# Altium PCB AnalogHmw.PcbDoc
Units mm, origin at the board's own origin, x right, y up, seen from the top; angles counter-clockwise.
Board outline 40.89 x 27.05 mm, 2 copper layers (Top Layer, Bottom Layer); 10 components, 10 nets, 27 pads, 4 vias.
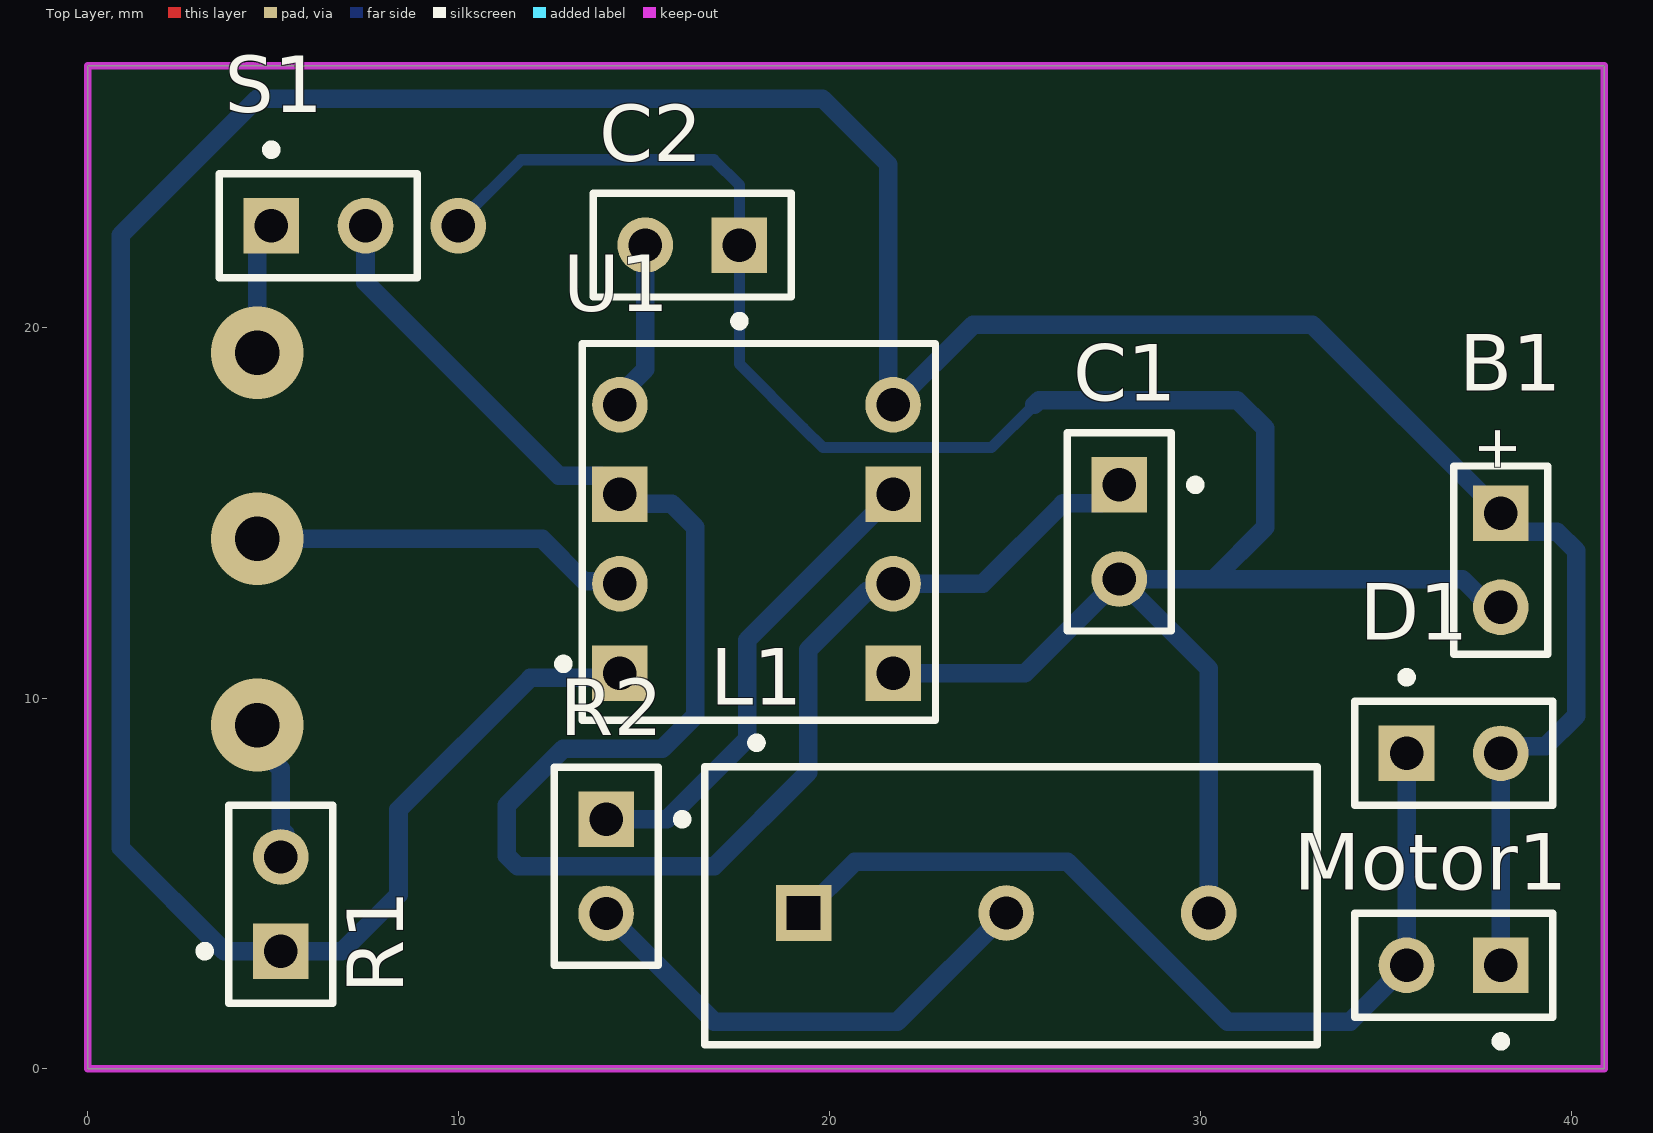
[diagram p0: Top Layer view]
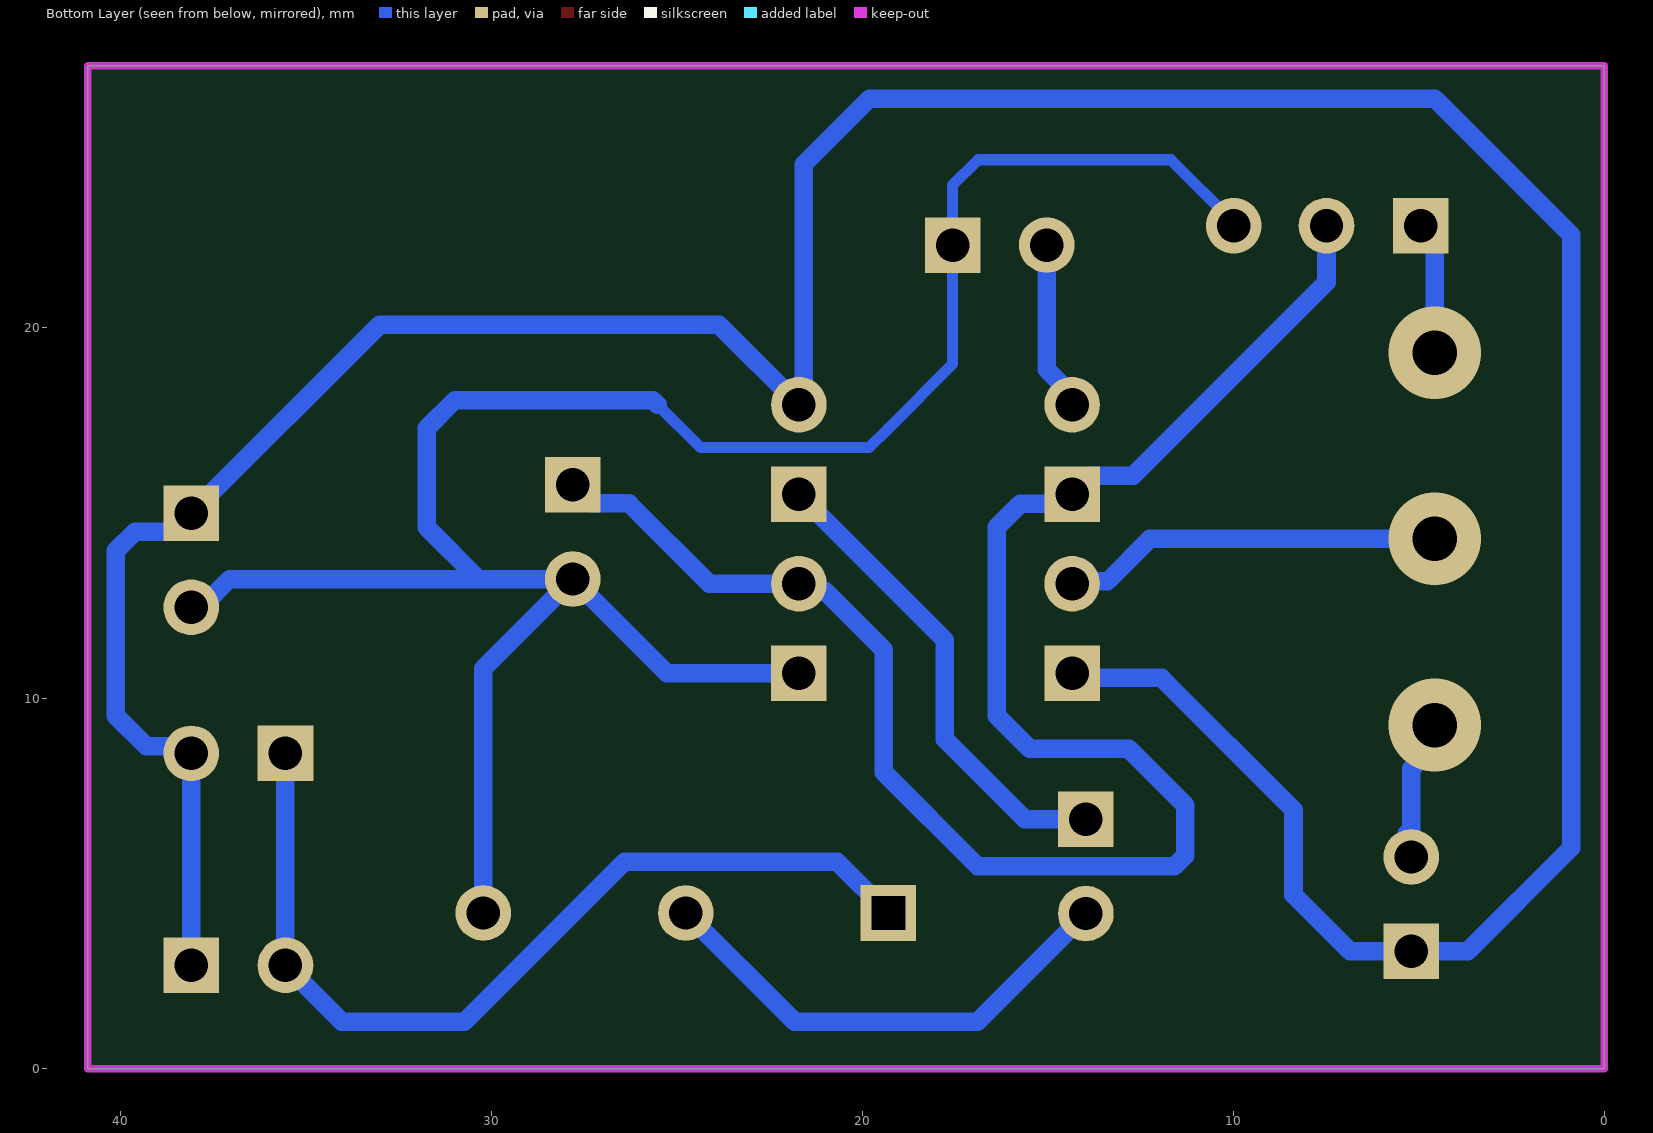
[diagram p1: Bottom Layer view, seen from below]

## Layer stack, top to bottom
Top Solder: solder mask 0.0102, Solder Resist, Dk 3.5
Top Layer: signal copper 0.0356
Dielectric 1: dielectric 0.32, FR-4, Dk 4.8
Bottom Layer: signal copper 0.0356
Bottom Solder: solder mask 0.0102, Solder Resist, Dk 3.5

## Board outline
0,0 40.894,0 40.894,27.051 0,27.051
cut-out: -1.27,27.559

## Design rules (kind name [scope] priority, off if disabled: settings)
Clearance [All] p1: gap=0.254 ignorepadtopadclearanceinfootprint=FALSE except(0: Arc-Hole Track-Hole SMDPad-Hole THPad-Hole Via-Hole Fill-Hole Poly-Hole Region-Hole Text-Hole)
PolygonConnect [All] p1: connectstyle=Relief reliefconductorwidth=0.254 reliefentries=4 polygonreliefangle="90 Angle" airgapwidth=0.254
RoutingVias [All] p1: holewidth=0.711 width=1.27 viastyle="Through Hole" minholewidth=0.711 minwidth=1.27 maxholewidth=0.711 maxwidth=1.27
SolderMaskExpansion [All] p1: expansion=0.102 istentingtop=FALSE
Width [All] p1: maxlimit=4 minlimit=0.254 preferedwidth=0.5
30 further rules are at their usual default settings.

## Components (designator, comment, footprint, x,y, rotation, side; value= is the part's Value field where it differs from the comment)
B1 "Bat" Bat 38.1,13.716 r270 top
C1 "Cap" Cap 27.813,14.478 r270 top
C2 "Cap" Cap 16.304,22.212 r180 top
D1 "Diode" Diode 36.83,8.509 r0 top
L1 "Tran" Tran 24.765,4.204 r0 top
Motor1 "Motor" Motor 36.83,2.794 r180 top
R1 "Res" Res 5.207,4.445 r90 top
R2 "Res" Res 13.98,5.461 r270 top
S1 "Sensor" Sensor 6.223,22.733 r0 top
U1 "555 Timer" "555 Timer" 18.034,14.605 r90 top

## Footprints (in the part's own frame and the unit in brackets; to place one, negate y for a bottom-side part, rotate by r counter-clockwise, add the part's x,y. Pads: shape width x height; smd on the part's side, far side on the other; paste and mask are expansions set on the pad)
"555 Timer" [mm]
  rect 1.5x1.5 hole 0.9: 1(-3.937,-3.683) 3(0.889,-3.683) 6(0.889,3.683) 8(-3.937,3.683)
  round 1.5 hole 0.9: 2(-1.524,-3.683) 4(3.302,-3.683) 5(3.302,3.683) 7(-1.524,3.683)
  silkscreen extent -5.21,-4.83 4.95,5.33, body extent -4.89,-3.96 4.89,3.96, height 5.52
Bat [mm]
  rect 1.5x1.5 hole 0.9: 1(-1.27,0)
  round 1.5 hole 0.9: 2(1.27,0)
  silkscreen extent -2.54,-1.27 2.54,1.27
Cap [mm]
  rect 1.5x1.5 hole 0.9: 1(-1.27,0)
  round 1.5 hole 0.9: 2(1.27,0)
  silkscreen extent -2.67,-1.4 2.67,2.18
Diode [mm]
  rect 1.5x1.5 hole 0.9: 1(-1.27,0)
  round 1.5 hole 0.9: 2(1.27,0)
  silkscreen extent -2.67,-1.4 2.67,2.17
Motor [mm]
  rect 1.5x1.5 hole 0.9: 1(-1.27,0)
  round 1.5 hole 0.9: 2(1.27,0)
  silkscreen extent -2.67,-1.4 2.67,2.17
Res [mm]
  rect 1.5x1.5 hole 0.9: 1(-1.27,0)
  round 1.5 hole 0.9: 2(1.27,0)
  silkscreen extent -2.67,-1.4 2.67,2.17
Sensor [mm]
  rect 1.5x1.5 hole 0.9: 1(-1.27,0)
  round 1.5 hole 0.9: 2(1.27,0)
  silkscreen extent -2.67,-1.4 2.67,2.17
Tran [mm]
  rect 1.5x1.5 hole 0.9 square: 1(-5.461,0)
  round 1.5 hole 0.9: 2(0,0) 3(5.461,0)
  silkscreen extent -8.13,-3.56 8.38,4.71

## Via types
v1: diameter 2.5, hole 1.2, Top Layer to Bottom Layer, 3 vias
v2: diameter 1.5, hole 0.9, Top Layer to Bottom Layer, 1 vias

## Nets (pads, with @x,y where several pads share a name; then routed paths per layer and width w, separated by ;. In a path a pad name is that pad's centre, name@x,y a point inside that pad or via, vN(x,y) a via of type N, cw(c..) or ccw(c..) an arc to the next point about the centre after c; other vN are vias at no path point)
GND: B1.2 C1.2 C2.1 L1.3 U1.1 | length 62.3
  Top Layer w0.254: C1.2 C1.2@28.142,13.208 ; B1.2@37.973,12.573 B1.2
  Bottom Layer w0.3: v2(9.993,22.733) 9.993,22.82 11.684,24.511 16.891,24.511 17.574,23.828 C2.1 17.574,19.002 19.304,17.272 19.823,16.753 24.373,16.753 25.527,17.907
  Bottom Layer w0.5: U1.1 25.273,10.668 C1.2 ; 25.527,17.907 25.654,18.034 30.988,18.034 31.75,17.272 31.75,14.605 30.353,13.208 ; L1.3 30.226,10.795 C1.2 ; B1.2 37.829,12.446 37.067,13.208 30.353,13.208 ; C1.2 30.353,13.208
NetB1_1: B1.1 D1.2 Motor1.1 R1.1 U1.4 U1.8 | length 99.7
  Top Layer w0.254: U1.4 U1.4@21.844,17.907
  Bottom Layer w0.5: U1.8@14.299,10.541 11.938,10.541 8.382,6.985 8.382,4.699 6.858,3.175 R1.1 3.683,3.175 0.889,5.969 0.889,22.479 4.572,26.162 19.812,26.162 21.59,24.384 21.59,18.034 U1.4 23.876,20.066 33.02,20.066 B1.1 38.354,14.986 38.354,14.732 38.6,14.486 39.616,14.486 40.132,13.97 40.132,9.525 39.307,8.7 38.291,8.7 D1.2 Motor1.1
NetC1_1: C1.1 S1.2 U1.2 U1.6 | length 48.5
  Bottom Layer w0.5: S1.2 7.493,21.209 12.708,15.994 13.851,15.994 U1.6 14.605,15.24 15.748,15.24 16.383,14.605 16.383,9.525 15.494,8.636 12.827,8.636 11.303,7.112 11.303,5.754 11.596,5.461 16.891,5.461 19.431,8.001 19.431,11.303 21.018,12.89 21.526,12.89 U1.2 24.13,13.081 26.297,15.248 27.313,15.248 C1.1
NetC2_2: C2.2 U1.5 | length 4.6
  Bottom Layer w0.5: U1.5 14.351,18.178 15.034,18.86 C2.2
NetD1_1: D1.1 L1.1 Motor1.2 | length 25
  Bottom Layer w0.5: L1.1 20.688,5.588 26.416,5.588 30.734,1.27 34.036,1.27 Motor1.2 D1.1
NetL1_2: L1.2 R2.2 | length 13.2
  Bottom Layer w0.5: R2.2 16.901,1.27 21.831,1.27 L1.2
NetPT1_1: R1.2 | length 4.5
  Bottom Layer w0.5: v1(4.572,9.271) 4.572,8.73 5.207,8.095 R1.2 5.334,5.842 R1.2@5.334,6.35
NetPT1_2: S1.1 | length 3.8
  Top Layer w0.5: v1(4.572,19.311) v1@4.699,19.438
  Bottom Layer w0.5: v1(4.572,19.311) 4.572,22.352 S1.1
NetPT1_3: U1.7 | length 10.4
  Bottom Layer w0.254: U1.7@14.224,13.208 14.287,13.144 U1.7
  Bottom Layer w0.5: v1(4.572,14.291) 12.252,14.291 13.399,13.144 U1.7@14.287,13.144
NetR2_1: R2.1 U1.3 | length 12.9
  Bottom Layer w0.5: R2.1 15.621,6.731 17.78,8.89 17.78,11.557 U1.3

## Keep-outs
Keep-Out Layer:
  the board outline again, w0.2

## Text inside footprints (layer, text, board x,y; h text height)
B1: Top Overlay "+" at 37.523,17.386 h1.15 r270